# Altium PCB CoreV1.1_test.PcbDoc (part 8 of 14)
Units mil, origin at the board's own origin, x right, y up, seen from the top; angles counter-clockwise.
Board outline 2860 x 2420 mil, 6 copper layers (Top Layer, GND, SIGNAL_1, SIGNAL_2, POWER, Bottom Layer); 110 components, 241 nets, 882 pads, 697 vias.
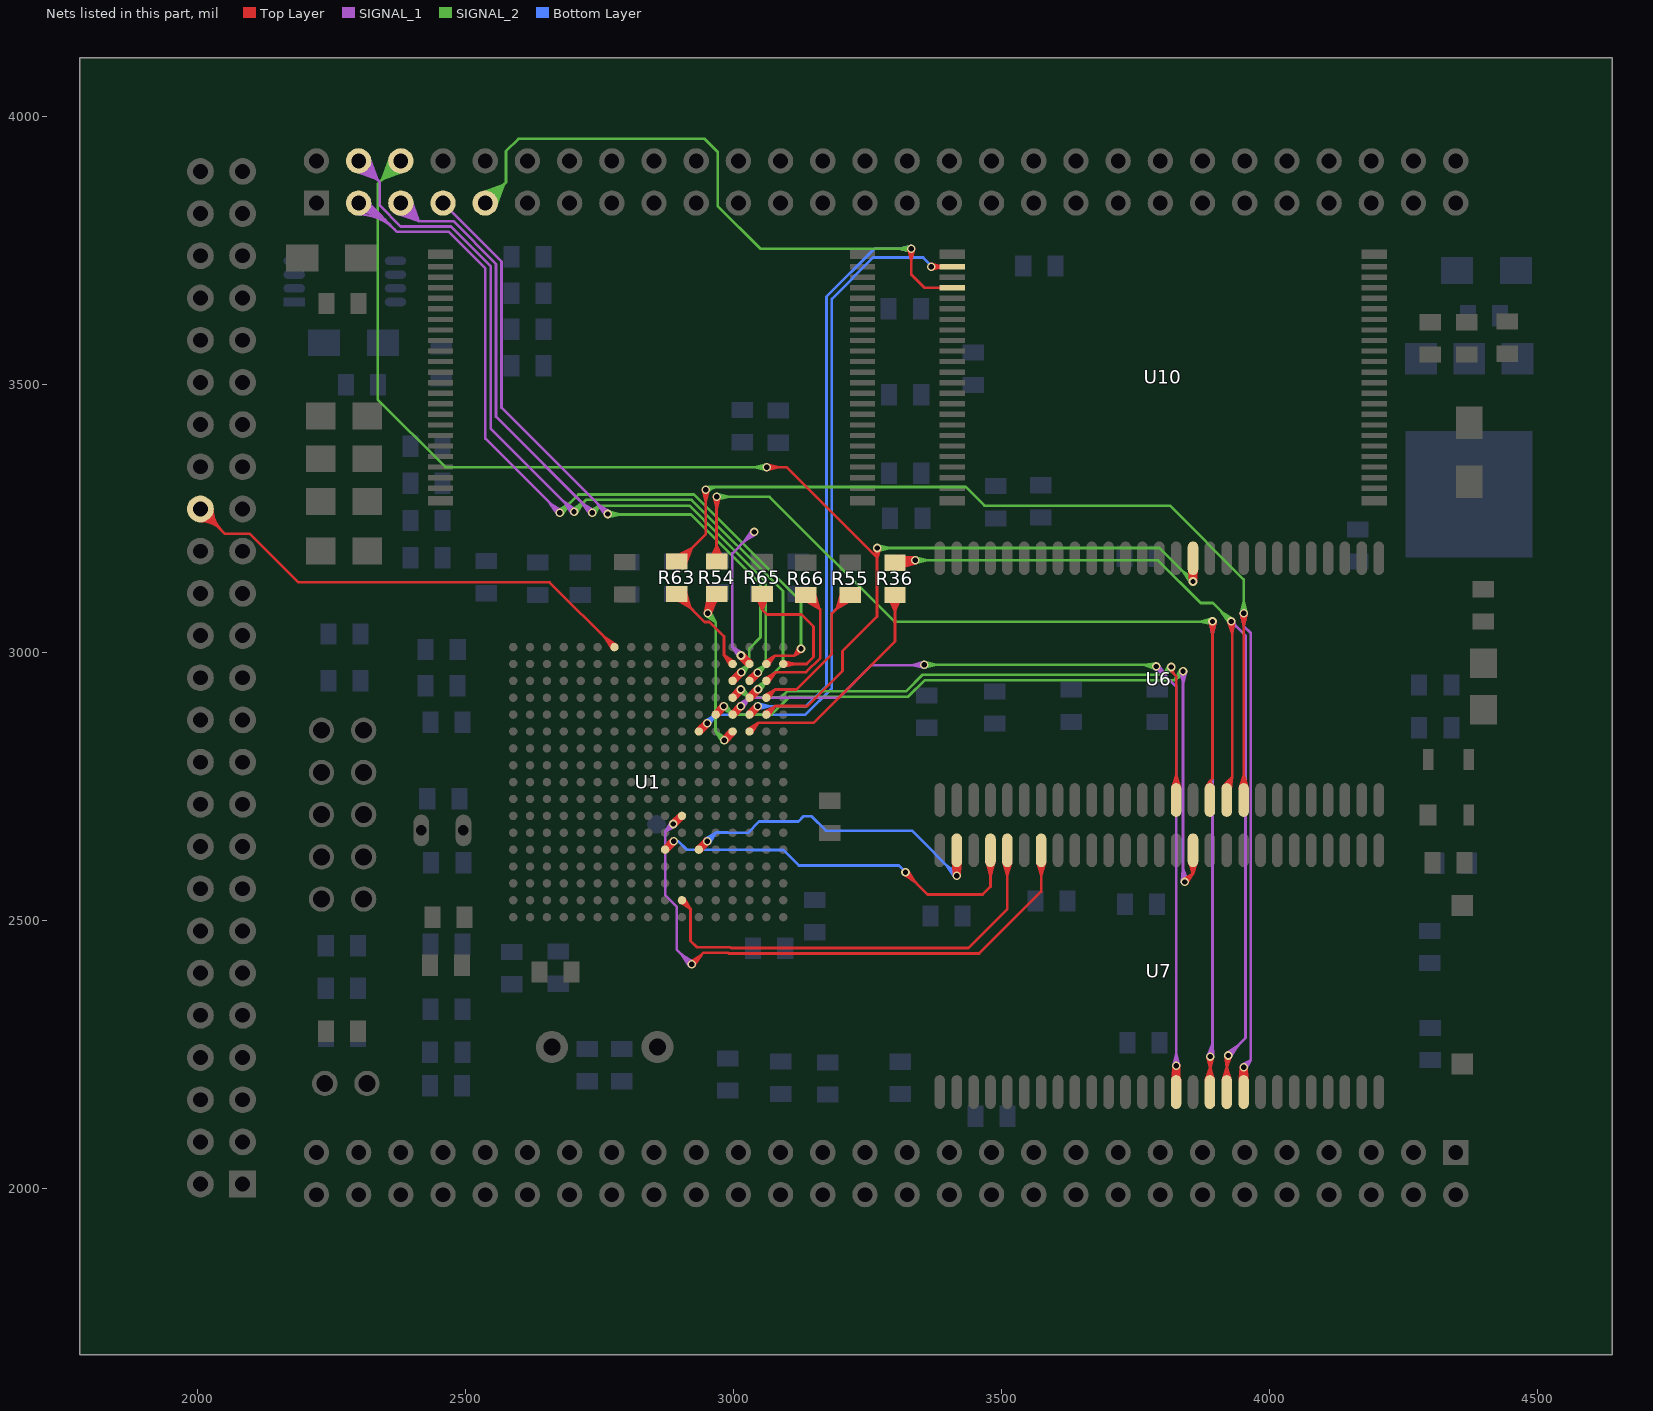
[diagram p12: the nets of this part, all layers, seen from the top]

## Via types
v1: diameter 16, hole 10, Top Layer to Bottom Layer, tented both sides, 637 vias
v2: diameter 30, hole 18, Top Layer to Bottom Layer, tented both sides, 56 vias
v3: diameter 16, hole 10, Top Layer to Bottom Layer, 2 vias
v4: diameter 30, hole 16, Top Layer to Bottom Layer, tented both sides, 1 vias
v5: diameter 16/16/16/16 (per signal layer), hole 10, Top Layer to Bottom Layer, tented both sides, 1 vias

## Nets (pads, with @x,y where several pads share a name; then routed paths per layer and width w, separated by ;. In a path a pad name is that pad's centre, name@x,y a point inside that pad or via, vN(x,y) a via of type N, cw(c..) or ccw(c..) an arc to the next point about the centre after c; other vN are vias at no path point) (continued)
LDATA28: U1.G11 U7.48 | length 1829.6
  Top Layer w5: v1@2883.32,2683.57 U1.G11@2899.63,2698.44 ; v1@2885.44,2685.1 U1.G11@2907.17,2690.9 ; v1@2887.5,2685.5 ccw(c2887.5,2701.76) U1.G11@2899,2690.26 ; v1@2890.73,2675.55 U1.G11@2907.17,2690.9 ; v1@2892.44,2677.57 U1.G11@2899.63,2698.44 ; v1@2893,2680 cw(c2903.29,2680) 2896.02,2687.28 ; U1.G11@2898.5,2695.14 cw(c2885.53,2695.14) 2894.7,2685.97 cw(c2903.88,2676.79) U1.G11@2903.88,2689.77 ; v1@2918.54,2422.27 2940.61,2436.61 v1@2926.27,2414.54 ; v1(2922,2418) 2944,2440 2989.72,2440 ; v1@2922,2423.5 ccw(c2922,2436.78) 2931.39,2427.39 ccw(c2940.78,2418) v1@2927.5,2418 ; 2990.72,2439 2991.22,2438.5 3458.5,2438.5 3574.1,2554.1 U7.48@3574.1,2630.91 ; U7.48@3566.84,2608.18 3574.1,2584.42 ; U7.48@3568.91,2604.07 cw(c3556.38,2591.53) 3574.1,2591.53 cw(c3591.83,2591.53) U7.48@3579.29,2604.07 ; U7.48@3574.1,2609.26 3574.1,2584.42 ; U7.48@3581.36,2608.18 3574.1,2584.42 ; v1(2887.5,2680) v1@2888.74,2680 ; v1(2887.5,2680) U1.G11@2903.88,2695.14 ; v1(2887.5,2680) U1.G11@2907.17,2690.9 ; v1(2887.5,2680) U1.G11@2899.63,2698.44 ; v1(2887.5,2680) U1.G11@2903.88,2695.14 ; v1@2888.74,2680 U1.G11@2903.88,2695.14 ; v1@2888.74,2680 U1.G11@2907.17,2690.9 ; v1@2888.74,2680 U1.G11@2899.63,2698.44 ; v1@2888.74,2680 U1.G11@2903.88,2695.14 ; U1.G11@2903.88,2695.14 2884.29,2684.47 U1.G11@2903.88,2695.14 ; U1.G11@2903.88,2695.14 2891.7,2676.45 U1.G11@2903.88,2695.14
  SIGNAL_1 w5: v1@2882,2680 cw(c2868.72,2680) 2878.11,2670.61 cw(c2887.5,2661.22) v1@2887.5,2674.5 ; v1@2883.14,2683.35 2872.5,2665 ; v1@2890.85,2675.64 2872.5,2665 ; v1@2916.5,2418 ccw(c2903.22,2418) 2912.61,2427.39 ccw(c2922,2436.78) v1@2922,2423.5 ; v1@2917.73,2414.54 2903.39,2436.61 ; v1@2925.46,2422.27 2903.39,2436.61 ; 2872.5,2665 v1(2887.5,2680) 2872.5,2665 ; 2872.5,2665 2872.5,2590.96 2872.51,2547.29 2894,2525.8 2894,2446 v1(2922,2418) 2903.39,2436.61
LDATA29: U1.G16 U7.50 | length 987
  Top Layer w5: U1.G16@2900.56,2533.44 2919.87,2521.66 ; U1.G16@2903.88,2532.29 cw(c2903.88,2519.31) 2913.05,2528.49 cw(c2922.23,2537.66) U1.G16@2909.25,2537.66 ; U1.G16@2903.88,2537.66 2919.87,2521.66 ; U1.G16@2908.1,2540.98 2919.87,2521.66 ; U7.50@3503.85,2608.18 3511.11,2584.42 ; U7.50@3505.92,2604.07 cw(c3493.38,2591.53) 3511.11,2591.53 cw(c3528.84,2591.53) U7.50@3516.3,2604.07 ; U7.50@3511.11,2609.26 3511.11,2584.42 ; U7.50@3511.11,2630.91 3511.11,2521.11 3438.5,2448.5 2995.36,2448.5 2993.86,2450 2931.83,2450 2919.87,2461.95 2919.87,2521.66 ; U7.50@3518.37,2608.18 3511.11,2584.42
LDATA30: U1.H13 U7.51 | length 1192.5
  Top Layer w5: U1.H13@2872.38,2637.52 ccw(c2872.38,2650.5) 2881.56,2641.32 ccw(c2890.73,2632.15) U1.H13@2877.76,2632.15 ; v1@2882.73,2648 cw(c2869.45,2648) 2878.84,2638.61 cw(c2888.23,2629.22) v1@2888.23,2642.5 ; v1@2883.21,2650.25 U1.H13@2876.61,2628.83 ; v1@2883.9,2651.38 U1.H13@2872.38,2632.15 ; v1@2884.82,2652.32 U1.H13@2869.06,2636.38 ; v1@2890.49,2642.98 U1.H13@2869.06,2636.38 ; v1@2891.61,2643.66 U1.H13@2872.38,2632.15 ; v1@2892.55,2644.59 U1.H13@2876.61,2628.83 ; v1@3317.54,2585.73 3339.61,2571.39 v1@3325.27,2593.46 ; v1@3321,2584.5 cw(c3321,2571.22) 3330.39,2580.61 cw(c3339.78,2590) v1@3326.5,2590 ; v1(3321,2590) 3362.5,2548.5 3465,2548.5 3479.61,2563.11 U7.51@3479.61,2630.91 ; U7.51@3472.35,2608.18 3479.61,2584.42 ; U7.51@3474.42,2604.07 cw(c3461.89,2591.53) 3479.61,2591.53 cw(c3497.34,2591.53) U7.51@3484.81,2604.07 ; U7.51@3479.61,2609.26 3479.61,2584.42 ; U7.51@3486.88,2608.18 3479.61,2584.42 ; U1.H13@2869.06,2636.38 v1(2888.23,2648) ; U1.H13@2869.06,2636.38 v1(2888.23,2648) ; U1.H13@2872.38,2632.15 v1(2888.23,2648) ; U1.H13@2872.38,2632.15 v1(2888.23,2648) ; U1.H13@2876.61,2628.83 v1(2888.23,2648) ; U1.H13@2876.61,2628.83 v1(2888.23,2648)
  Bottom Layer w5: v1(2888.23,2648) 2896.86,2648 2912.86,2632 3031.5,2632 3032,2631.5 3093,2631.5 3122,2602.5 3308.5,2602.5 v1(3321,2590)
LDATA31: U1.F13 U7.53 | length 1433.3
  Top Layer w5: U1.F13@2935.37,2631.63 U1.F13@2935.37,2632.15 ; U1.F13@2935.37,2637.52 ccw(c2935.37,2650.5) 2944.55,2641.32 ccw(c2953.72,2632.15) U1.F13@2940.75,2632.15 ; v1@2945.72,2648 cw(c2932.45,2648) 2941.83,2638.61 cw(c2951.22,2629.22) v1@2951.22,2642.5 ; v1@2946.21,2650.25 U1.F13@2939.6,2628.83 ; v1@2946.89,2651.38 U1.F13@2935.37,2632.15 ; v1@2947.82,2652.32 U1.F13@2932.06,2636.38 ; v1@2953.48,2642.98 U1.F13@2932.06,2636.38 ; v1@2954.61,2643.66 U1.F13@2935.37,2632.15 ; v1@2955.54,2644.59 U1.F13@2939.6,2628.83 ; U7.53@3409.36,2608.18 v1@3416.62,2584.42 ; v1@3411.2,2582.7 U7.53@3410.02,2606.01 ; U7.53@3411.43,2604.07 cw(c3398.9,2591.53) 3416.62,2591.53 cw(c3434.35,2591.53) U7.53@3421.81,2604.07 ; v1@3411.57,2585.79 U7.53@3423.22,2606.01 ; v1@3412.73,2587.51 ccw(c3403.34,2596.9) 3416.62,2596.9 ccw(c3429.9,2596.9) v1@3420.51,2587.51 ; U7.53@3416.62,2609.26 v1@3416.62,2584.42 ; U7.53@3416.62,2630.91 v1(3416.62,2583.62) ; v1@3421.68,2585.79 U7.53@3410.02,2606.01 ; v1@3422.04,2582.7 U7.53@3423.22,2606.01 ; U7.53@3423.88,2608.18 v1@3416.62,2584.42 ; U1.F13@2932.06,2636.38 v1(2951.22,2648) ; U1.F13@2932.06,2636.38 v1(2951.22,2648) ; U1.F13@2935.37,2632.15 v1(2951.22,2648) ; U1.F13@2935.37,2632.15 v1(2951.22,2648) ; U1.F13@2939.6,2628.83 v1(2951.22,2648) ; U1.F13@2939.6,2628.83 v1(2951.22,2648) ; U7.53@3410.02,2606.01 v1(3416.62,2583.62) ; v1(3416.62,2583.62) U7.53@3423.22,2606.01 ; v1(3416.62,2583.62) U7.53@3416.62,2606.62 ; U7.53@3416.62,2606.62 3411.16,2584.28 U7.53@3416.62,2606.62 ; U7.53@3416.62,2606.62 3422.08,2584.28 U7.53@3416.62,2606.62
  Bottom Layer w5: v1@2947.84,2652.33 2967.24,2664.02 ; v1(2951.22,2648) 2967.24,2664.02 ; v1@2951.22,2653.5 ccw(c2951.22,2666.78) 2960.61,2657.39 ccw(c2970,2648) v1@2956.72,2648 ; v1@2955.56,2644.61 2967.24,2664.02 ; v1@3411.12,2583.62 ccw(c3397.84,2583.62) 3407.23,2593.01 ccw(c3416.62,2602.4) v1@3416.62,2589.12 ; v1@3412.35,2580.16 3398.02,2602.23 ; v1@3420.08,2587.9 3398.02,2602.23 ; 2967.24,2664.02 2988.42,2664.02 2988.94,2663.5 3027,2663.5 3048,2684.5 3121.06,2684.5 3131.06,2694.5 3145.42,2694.5 3172.42,2667.5 3332.74,2667.5 v1(3416.62,2583.62) 3398.02,2602.23
LEND: pad.PB34 U1.L1 | length 1177.3
  Top Layer w5: pad.PB34@2005.26,3245.34 cw(c2005.26,3191.02) 2043.67,3229.43 cw(c2082.08,3267.84) pad.PB34@2027.76,3267.84 ; pad.PB34@2005.26,3250.34 cw(c2005.26,3208.09) 2035.13,3237.97 cw(c2065.01,3267.84) pad.PB34@2022.76,3267.84 ; pad.PB34@2005.26,3255.34 cw(c2005.26,3225.16) 2026.6,3246.5 cw(c2047.94,3267.84) pad.PB34@2017.76,3267.84 ; pad.PB34@2005.26,3267.84 2051.5,3221.6 2097.46,3221.6 2188.06,3131 2657,3131 U1.L1@2777.89,3010.1 2759.41,3028.58 ; U1.L1@2772.52,3010.1 ccw(c2759.55,3010.1) 2768.72,3019.28 ccw(c2777.89,3028.45) U1.L1@2777.89,3015.48 ; U1.L1@2773.72,3006.71 2759.41,3028.58 ; U1.L1@2781.28,3014.27 2759.41,3028.58
LLNSCAS: R54.2 U1.D6 | length 1792.1
  Top Layer w5: v1@2946.53,3073.53 R54.2@2951.47,3096 ; v1@2946.55,3073.75 2952,3093.09 ; v1@2946.63,3074.19 R54.2@2954.29,3095.95 ; v1@2946.94,3075.14 R54.2@2958.57,3095.56 ; v1@2947.41,3076.04 R54.2@2963.07,3094.69 ; v1@2947.84,3076.59 2966.3,3093.78 ; v1@2948.11,3076.89 ccw(c2938.72,3086.28) 2952,3086.28 ccw(c2965.28,3086.28) v1@2955.89,3076.89 ; R54.2@2951.06,3111.42 v1@2952,3076.66 ; v1@2952,3071.26 cw(c2982.04,3071.26) R54.2@2968.88,3098.27 ; v1@2952,3079.26 cw(c2978.14,3079.26) R54.2@2966.69,3102.76 ; 2952,3087.26 cw(c2974.25,3087.26) R54.2@2964.5,3107.26 ; R54.2@2952,3095.25 cw(c2970.35,3095.25) R54.2@2962.31,3111.75 ; R54.2@2954.52,3100.72 cw(c2951.93,3098.17) 2954.5,3095.6 cw(c2959.1,3091) R54.2@2960.57,3097.33 ; R54.2@2956.1,3111.19 v1@2952,3076.66 ; v1@2956.84,3070.39 2966.3,3093.78 ; v1@2957.15,3071.07 R54.2@2963.07,3094.69 ; v1@2957.42,3072.09 R54.2@2958.57,3095.56 ; v1@2957.45,3073.75 2952,3093.09 ; v1@2957.44,3073.78 R54.2@2951.47,3096 ; v1@2957.5,3073.11 R54.2@2954.29,3095.95 ; R54.2@2968.41,3109.5 2952,3093.09 ; R54.2@2970.19,3106.29 v1@2952,3076.66 ; R54.2@2974.29,3103.35 v1@2952,3076.66 ; v1@2978.56,2839.24 U1.D6@2994.13,2855.92 ; v1@2980.55,2840.92 U1.D6@3001.67,2848.38 ; v1@2983,2841.5 ccw(c2983,2851.75) 2990.24,2844.5 ; v1@2986.58,2831.82 U1.D6@3001.67,2848.38 ; v1@2988.09,2833.92 U1.D6@2994.13,2855.92 ; v1@2988.5,2836 cw(c3004.81,2836) U1.D6@2993.28,2847.53 ; U1.D6@2992.99,2852.62 cw(c2980.02,2852.62) 2989.19,2843.45 cw(c2998.37,2834.27) U1.D6@2998.37,2847.25 ; R54.2@2951.47,3096 v1(2952,3073) ; v1(2952,3073) 2952,3093.09 ; v1(2952,3073) R54.2@2954.29,3095.95 ; v1(2952,3073) 2966.3,3093.78 ; v1(2952,3073) R54.2@2963.07,3094.69 ; v1(2952,3073) R54.2@2958.57,3095.56 ; v1@2952,3076.66 R54.2@2963.41,3109.5 ; 2952,3093.09 2970.93,3099.52 2952,3093.09 ; 2952,3093.09 2951.43,3113.07 2952,3093.09 ; 2952,3093.09 2968.65,3104.14 2952,3093.09 ; 2952,3093.09 2956.56,3112.55 2952,3093.09 ; 2952,3093.09 R54.2@2963.41,3109.5 ; 2952,3093.09 R54.2@2963.41,3109.5 ; v1(2983,2836) v1@2983,2837.26 ; v1(2983,2836) U1.D6@2998.37,2852.62 ; v1(2983,2836) U1.D6@3001.67,2848.38 ; v1(2983,2836) U1.D6@2994.13,2855.92 ; v1(2983,2836) U1.D6@2998.37,2852.62 ; v1@2983,2837.26 U1.D6@2998.37,2852.62 ; v1@2983,2837.26 U1.D6@3001.67,2848.38 ; v1@2983,2837.26 U1.D6@2994.13,2855.92 ; v1@2983,2837.26 U1.D6@2998.37,2852.62 ; U1.D6@2998.37,2852.62 2979.44,2840.2 U1.D6@2998.37,2852.62 ; U1.D6@2998.37,2852.62 2987.46,2832.78 U1.D6@2998.37,2852.62
  SIGNAL_2 w5: v1@2948.35,3068.89 2966.87,3056.13 ; v1@2952,3067.5 cw(c2952,3059.05) 2957.97,3065.03 ; v1@2956.54,3076.11 2966.87,3056.13 ; v1@2957.5,3073 ccw(c2975.61,3073) 2962.8,3060.2 ; 2966.87,3028 2966.87,3022 ; v1@2977.5,2836 ccw(c2964.22,2836) 2973.61,2845.39 ccw(c2983,2854.78) v1@2983,2841.5 ; v1@2978.68,2832.6 2966.5,2852.5 ; v1@2986.4,2840.32 2966.5,2852.5 ; 2966.5,2852.5 2966.5,2923.63 2966.87,2924 2966.87,3022 ; 2966.5,2852.5 v1(2983,2836) 2966.5,2852.5 ; 2966.87,3022 2966.87,3056.13 ; 2966.87,3056.13 2952,3071 v1(2952,3073) 2966.87,3056.13
LLNSCS0: R63.2 U1.D2 | length 520.6
  Top Layer w5: R63.2@2891.17,3100.1 2919.48,3083.6 ; R63.2@2894.04,3104.26 2919.48,3083.6 ; R63.2@2894.41,3109.5 2894.41,3108.67 2945.98,3057.1 2955.42,3057.1 2982.24,3030.27 2982.24,2994.73 ; R63.2@2899.41,3097 cw(c2899.41,3080.91) 2910.79,3092.29 ; R63.2@2899.41,3109.5 2919.48,3083.6 ; R63.2@2901.91,3109.5 ccw(c2922.03,3109.5) R63.2@2907.8,3095.28 ; R63.2@2905.82,3113.39 2919.48,3083.6 ; R63.2@2906.91,3109.5 ccw(c2939.1,3109.5) 2916.34,3086.74 ; R63.2@2910.57,3115.14 2919.48,3083.6 ; R63.2@2911.91,3109.5 ccw(c2956.17,3109.5) 2924.87,3078.21 ; U1.D2@2992.99,2978.61 ccw(c2980.02,2978.61) 2989.19,2987.78 ccw(c2998.37,2996.95) U1.D2@2998.37,2983.98 ; U1.D2@2994.14,2975.28 2982.24,2994.73 ; U1.D2@3001.69,2982.83 2982.24,2994.73 ; 2982.24,2994.73 U1.D2@2998.37,2978.61 2982.24,2994.73
LLNSRAS: R36.2 U1.C6 | length 744.3
  Top Layer w5: U1.C6@3026.62,2856.91 3046.73,2868.74 ; U1.C6@3029.86,2858 ccw(c3029.86,2872.78) 3040.31,2862.32 ; U1.C6@3034,2849.19 3046.73,2868.74 ; U1.C6@3035.24,2852.62 cw(c3046.4,2852.62) 3038.51,2860.52 ; R36.2@3289.18,3104.9 3301.41,3077.5 ; R36.2@3292.57,3098.67 cw(c3271.23,3077.33) 3301.41,3077.33 cw(c3331.59,3077.33) R36.2@3310.25,3098.67 ; R36.2@3293.97,3106.57 3301.41,3077.5 ; R36.2@3296.11,3102.2 cw(c3283.3,3089.4) 3301.41,3089.4 cw(c3319.51,3089.4) R36.2@3306.71,3102.2 ; R36.2@3308.85,3106.57 3301.41,3077.5 ; R36.2@3313.63,3104.9 3301.41,3077.5 ; 3046.73,2868.74 3030.61,2852.62 U1.C6@3029.86,2852.62 3046.73,2868.74 ; 3046.73,2868.74 3149.68,2868.74 3301.41,3020.47 R36.2@3301.41,3107.5 3301.41,3077.5
LLSCKE: R65.2 U1.A2 | length 538.8
  Top Layer w5: R65.2@3041.21,3106.41 3053.41,3080.24 ; R65.2@3044.86,3100 cw(c3026.32,3080.25) 3053.41,3080.25 ; R65.2@3045.97,3108.14 3053.41,3080.24 ; R65.2@3048.28,3103.65 cw(c3037.16,3091.79) 3053.41,3091.79 cw(c3069.66,3091.79) R65.2@3058.54,3103.65 ; R65.2@3051.41,3107.5 3053.41,3107.5 3053.41,3080.24 ; R65.2@3053.41,3109.12 3053.41,3080.24 ; R65.2@3060.85,3108.14 3053.41,3080.24 ; R65.2@3061.96,3100 ccw(c3080.5,3080.25) 3053.41,3080.25 ; R65.2@3065.61,3106.41 3053.41,3080.24 ; U1.A2@3092.85,2978.61 3136.61,2978.61 3149.5,2991.5 3149.5,3048.5 3127,3071 3062.65,3071 3053.41,3080.24 ; U1.A2@3093.49,2973.27 3115.73,2978.61 U1.A2@3093.49,2983.94 ; U1.A2@3096.65,2974.81 cw(c3105.83,2965.63) 3105.83,2978.61 cw(c3105.83,2991.58) U1.A2@3096.65,2982.41
LLSCLK0: R55.2 U1.B4 | length 603.3
  Top Layer w5: U1.B4@3058.14,2919.92 3077.49,2931 ; U1.B4@3061.36,2920.99 ccw(c3061.36,2935.77) 3071.81,2925.32 ; U1.B4@3065.51,2912.2 3077.49,2931 ; U1.B4@3066.73,2915.61 cw(c3077.9,2915.61) 3070,2923.51 ; 3188.2,3077.63 ccw(c3158.33,3107.5) R55.2@3200.58,3107.5 ; 3196.74,3086.17 ccw(c3175.4,3107.5) R55.2@3205.58,3107.5 ; 3200.27,3089.7 cw(c3213.08,3076.9) R55.2@3213.08,3095 ; R55.2@3202.03,3113.35 3192.47,3081.9 ; R55.2@3206.74,3111.51 3192.47,3081.9 ; R55.2@3213.08,3107.5 3192.47,3081.9 ; R55.2@3218.08,3107.5 3183.5,3072.93 3183.5,2997.22 3117.28,2931 3077.49,2931 ; R55.2@3218.35,3102.17 3192.47,3081.9 ; R55.2@3221.15,3097.96 3192.47,3081.9 ; 3077.49,2931 3062.11,2915.61 U1.B4@3061.36,2915.61 3077.49,2931
LLSCLK1: R66.2 U1.B3 | length 561.6
  Top Layer w5: U1.B3@3058.23,2951.48 3079.26,2963.23 ; U1.B3@3061.36,2952.48 ccw(c3061.36,2969.76) 3073.58,2957.55 ; U1.B3@3065.38,2943.54 3079.26,2963.23 ; U1.B3@3066.73,2947.11 cw(c3075.4,2947.11) 3069.27,2953.24 ; R66.2@3131.67,3097.96 3160.35,3081.9 ; R66.2@3134.47,3102.17 3160.35,3081.9 ; R66.2@3134.74,3107.5 3162,3080.25 3162,2989.86 3135.37,2963.23 3079.26,2963.23 ; R66.2@3139.74,3095 cw(c3139.74,3076.9) 3152.55,3089.7 cw(c3166.19,3103.32) R66.2@3147.15,3106.33 ; R66.2@3139.74,3107.5 3160.35,3081.9 ; R66.2@3146.08,3111.51 3160.35,3081.9 ; R66.2@3150.79,3113.35 3160.35,3081.9 ; R66.2@3152.09,3105.55 ccw(c3178.17,3101.42) 3159.5,3082.75 ; 3079.26,2963.23 3063.14,2947.11 U1.B3@3061.36,2947.11 3079.26,2963.23
LNGCS0: U1.F6 U10.26 | length 1781.4
  Top Layer w5: U1.F6@2935.37,2858 ccw(c2935.37,2870.97) 2944.55,2861.8 ccw(c2953.72,2852.62) U1.F6@2940.75,2852.62 ; v1@2945.5,2868.25 cw(c2932.22,2868.25) 2941.61,2858.86 cw(c2951,2849.47) v1@2951,2862.75 ; v1@2945.97,2870.47 U1.F6@2939.61,2849.31 ; v1@2946.66,2871.62 U1.F6@2935.37,2852.62 ; v1@2947.6,2872.57 U1.F6@2932.06,2856.86 ; v1@2953.23,2863.22 U1.F6@2932.06,2856.86 ; v1@2954.37,2863.91 U1.F6@2935.37,2852.62 ; v1@2955.32,2864.85 U1.F6@2939.61,2849.31 ; v1@3369.66,3714.54 3392,3720 v1@3369.66,3725.46 ; v1@3369.71,3725.45 U10.26@3389.72,3720.06 ; v1@3369.74,3714.55 U10.26@3389.72,3720.06 ; v1@3369.8,3720 U10.26@3389.72,3720.06 ; v1@3372.89,3716.11 cw(c3382.28,3706.72) 3382.28,3720 cw(c3382.28,3733.28) v1@3372.89,3723.89 ; 3383.74,3720 ccw(c3383.74,3726.04) U10.26@3388.01,3721.77 ; 3384.02,3720 cw(c3384.02,3714.35) U10.26@3388.01,3718.35 ; U10.26@3408.42,3720.06 3408.37,3720 v1(3369,3720) U10.26@3389.72,3720.06 ; U1.F6@2932.06,2856.86 v1(2951,2868.25) ; U1.F6@2932.06,2856.86 v1(2951,2868.25) ; U1.F6@2935.37,2852.62 v1(2951,2868.25) ; U1.F6@2935.37,2852.62 v1(2951,2868.25) ; U1.F6@2939.61,2849.31 v1(2951,2868.25) ; U1.F6@2939.61,2849.31 v1(2951,2868.25)
  Bottom Layer w5: v1@2947.62,2872.58 2966.87,2884.12 ; v1(2951,2868.25) 2966.87,2884.12 ; v1@2951,2873.75 ccw(c2951,2887.03) 2960.39,2877.64 ccw(c2969.78,2868.25) v1@2956.5,2868.25 ; v1@2955.34,2864.86 2966.87,2884.12 ; v1(3369,3720) 3369,3721.92 3353.92,3737 3260.64,3737 3183.5,3659.86 3183.5,2933.36 3134.13,2883.99 3007.32,2883.99 3007.19,2884.12 2966.87,2884.12
LNGCS1: pad.PC3 U1.B2 | length 2181.1
  Top Layer w5: U1.B2@3058.15,2982.91 3077.48,2993.98 ; U1.B2@3061.36,2983.98 ccw(c3061.36,2998.76) 3071.81,2988.31 ; U1.B2@3065.51,2975.19 3077.48,2993.98 ; U1.B2@3066.73,2978.61 cw(c3077.9,2978.61) 3070,2986.5 ; v1@3120.5,3007 cw(c3107.22,3007) 3116.61,2997.61 cw(c3126,2988.22) v1@3126,3001.5 ; v1@3121.57,3010.26 3112.98,2993.98 ; v1@3129.26,3002.57 3112.98,2993.98 ; 3077.48,2993.98 3112.98,2993.98 ; 3077.48,2993.98 3062.11,2978.61 U1.B2@3061.36,2978.61 3077.48,2993.98 ; 3112.98,2993.98 v1(3126,3007) 3112.98,2993.98
  SIGNAL_1 w5: pad.PC3@2300.54,3817.59 cw(c2300.54,3722.52) 2367.76,3789.74 ; pad.PC3@2300.54,3822.59 cw(c2300.54,3739.59) 2359.22,3798.28 ; pad.PC3@2300.54,3827.59 cw(c2300.54,3756.66) 2350.69,3806.81 ; pad.PC3@2300.54,3832.59 cw(c2300.54,3773.73) 2342.15,3815.35 ; pad.PC3@2300.54,3837.59 cw(c2300.54,3790.8) 2333.62,3823.88 ; pad.PC3@2300.54,3838.71 2318.79,3838.71 2372.5,3785 2468.86,3785 2536.98,3716.88 2536.98,3399.52 v1(2676,3260.5) 2657.39,3279.11 ; pad.PC3@2300.54,3842.59 cw(c2300.54,3807.87) 2325.08,3832.42 ; pad.PC3@2321.66,3838.71 ccw(c2328.58,3838.71) 2323.68,3833.82 ; v1@2670.5,3260.5 ccw(c2657.22,3260.5) 2666.61,3269.89 ccw(c2676,3279.28) v1@2676,3266 ; v1@2671.73,3257.04 2657.39,3279.11 ; v1@2679.46,3264.77 2657.39,3279.11
  SIGNAL_2 w5: v1@2672.54,3264.77 2694.61,3279.11 v1@2680.27,3257.04 ; v1(2676,3260.5) 2710.43,3294.93 2926.21,3294.93 3126,3095.14 v1(3126,3007) ; v1@2676,3266 ccw(c2676,3279.28) 2685.39,3269.89 ccw(c2694.78,3260.5) v1@2681.5,3260.5 ; v1@3122.11,3010.89 ccw(c3112.72,3020.28) 3126,3020.28 ccw(c3139.28,3020.28) v1@3129.89,3010.89
LNGCS2: pad.PC5 U1.C3 | length 2410.7
  Top Layer w5: U1.C3@3029.86,2952.48 ccw(c3029.86,2965.46) 3039.04,2956.28 ccw(c3048.21,2947.11) U1.C3@3035.24,2947.11 ; v1@3039.74,2962.48 cw(c3026.46,2962.48) 3035.85,2953.09 cw(c3045.24,2943.71) v1@3045.24,2956.98 ; v1@3040.19,2964.68 U1.C3@3034.1,2943.81 ; v1@3040.89,2965.85 U1.C3@3029.86,2947.11 ; v1@3041.84,2966.81 U1.C3@3026.56,2951.35 ; v1@3047.43,2957.44 U1.C3@3026.56,2951.35 ; v1@3048.6,2958.13 U1.C3@3029.86,2947.11 ; v1@3049.57,2959.09 U1.C3@3034.1,2943.81 ; U1.C3@3026.56,2951.35 v1(3045.24,2962.48) ; U1.C3@3026.56,2951.35 v1(3045.24,2962.48) ; U1.C3@3029.86,2947.11 v1(3045.24,2962.48) ; U1.C3@3029.86,2947.11 v1(3045.24,2962.48) ; U1.C3@3034.1,2943.81 v1(3045.24,2962.48) ; U1.C3@3034.1,2943.81 v1(3045.24,2962.48)
  SIGNAL_1 w5: pad.PC5@2368.02,3820.83 2412.98,3805 ; pad.PC5@2369.97,3825.54 2412.98,3805 ; pad.PC5@2372.38,3829.98 2412.98,3805 ; pad.PC5@2375.23,3834.11 2412.98,3805 ; pad.PC5@2379.28,3838.71 2412.98,3805 ; pad.PC5@2379.82,3827.6 cw(c2380.93,3804.86) 2397.02,3820.96 cw(c2413.12,3837.05) pad.PC5@2390.38,3838.17 ; pad.PC5@2380.06,3822.61 cw(c2381.67,3789.65) 2405,3812.98 cw(c2428.33,3836.31) pad.PC5@2395.38,3837.92 ; pad.PC5@2380.31,3817.61 cw(c2382.42,3774.44) 2412.98,3805 ; pad.PC5@2383.87,3842.75 2412.98,3805 ; pad.PC5@2388,3845.6 2412.98,3805 ; pad.PC5@2392.44,3848.02 2412.98,3805 ; pad.PC5@2397.15,3849.96 2412.98,3805 ; pad.PC5@2400.37,3837.68 ccw(c2443.55,3835.57) 2412.98,3805 ; v1@2731,3260.5 ccw(c2717.72,3260.5) 2727.11,3269.89 ccw(c2736.5,3279.28) v1@2736.5,3266 ; v1@2732.23,3257.04 2717.89,3279.11 ; v1@2739.96,3264.77 2717.89,3279.11 ; 2412.98,3805 2477.14,3805 2556.98,3725.17 2556.98,3440.02 v1(2736.5,3260.5) 2717.89,3279.11
  SIGNAL_2 w5: v1@2733.21,3264.91 2750,3274 ; v1(2736.5,3260.5) 2750,3274 ; v1@2736.5,3266 ccw(c2736.5,3279.28) 2745.89,3269.89 ccw(c2755.28,3260.5) v1@2742,3260.5 ; v1@2740.91,3257.21 2750,3274 ; 2945.5,3246.64 2953.57,3238.57 ; v1@3041.87,2966.84 3060.5,2977.75 ; v1(3045.24,2962.48) 3060.5,2977.75 ; v1@3045.24,2967.98 ccw(c3045.24,2981.26) 3054.63,2971.87 ccw(c3064.01,2962.48) v1@3050.74,2962.48 ; v1@3049.59,2959.12 3060.5,2977.75 ; 2750,3274 2918.14,3274 2953.57,3238.57 ; 2953.57,3238.57 3060.5,3131.64 3060.5,2977.75
LNGCS3: pad.PC4 U1.C4 | length 2677
  Top Layer w5: U1.C4@3029.86,2920.99 ccw(c3029.86,2933.96) 3039.04,2924.79 ccw(c3048.21,2915.61) U1.C4@3035.24,2915.61 ; v1@3040.25,2931.5 cw(c3026.97,2931.5) 3036.36,2922.11 cw(c3045.75,2912.72) v1@3045.75,2926 ; v1@3040.73,2933.76 U1.C4@3034.09,2912.3 ; v1@3041.41,2934.88 U1.C4@3029.86,2915.61 ; v1@3042.34,2935.82 U1.C4@3026.54,2919.84 ; v1@3048.01,2926.48 U1.C4@3026.54,2919.84 ; v1@3049.13,2927.16 U1.C4@3029.86,2915.61 ; v1@3050.06,2928.09 U1.C4@3034.09,2912.3 ; U1.C4@3026.54,2919.84 v1(3045.75,2931.5) ; U1.C4@3026.54,2919.84 v1(3045.75,2931.5) ; U1.C4@3029.86,2915.61 v1(3045.75,2931.5) ; U1.C4@3029.86,2915.61 v1(3045.75,2931.5) ; U1.C4@3034.09,2912.3 v1(3045.75,2931.5) ; U1.C4@3034.09,2912.3 v1(3045.75,2931.5)
  SIGNAL_1 w5: pad.PC4@2289.22,3899.61 2334.76,3883.22 ; pad.PC4@2291.19,3904.31 2334.76,3883.22 ; pad.PC4@2293.63,3908.73 2334.76,3883.22 ; pad.PC4@2296.49,3912.85 2334.76,3883.22 ; pad.PC4@2300.54,3896.33 cw(c2300.54,3845.33) 2336.59,3881.39 cw(c2372.65,3917.45) pad.PC4@2321.66,3917.45 ; pad.PC4@2300.54,3901.33 cw(c2300.54,3862.4) 2328.06,3889.93 cw(c2355.58,3917.45) pad.PC4@2316.66,3917.45 ; pad.PC4@2300.54,3906.33 cw(c2300.54,3879.48) 2319.52,3898.46 cw(c2338.51,3917.45) pad.PC4@2311.66,3917.45 ; pad.PC4@2300.54,3917.45 2340,3877.98 2340,3833.97 2378.97,3795 2473,3795 2546.98,3721.02 2546.98,3418.03 v1(2702.5,3262.5) 2683.89,3281.11 ; pad.PC4@2305.13,3921.49 2334.76,3883.22 ; pad.PC4@2309.25,3924.36 2334.76,3883.22 ; pad.PC4@2313.68,3926.79 2334.76,3883.22 ; pad.PC4@2318.37,3928.77 2334.76,3883.22 ; v1@2697,3262.5 ccw(c2683.72,3262.5) 2693.11,3271.89 ccw(c2702.5,3281.28) v1@2702.5,3268 ; v1@2698.23,3259.04 2683.89,3281.11 ; v1@2705.96,3266.78 2683.89,3281.11
  SIGNAL_2 w5: v1@2699.04,3266.78 2721.11,3281.11 v1@2706.77,3259.04 ; v1(2702.5,3262.5) 2724.93,3284.93 2922.07,3284.93 3092.5,3114.5 3092.5,2978.25 v1(3045.75,2931.5) ; v1@2702.5,3268 ccw(c2702.5,3281.28) 2711.89,3271.89 ccw(c2721.28,3262.5) v1@2708,3262.5 ; v1@3042.29,2935.77 3064.35,2950.11 v1@3050.02,2928.04 ; v1@3045.75,2937 ccw(c3045.75,2950.28) 3055.14,2940.89 ccw(c3064.53,2931.5) v1@3051.25,2931.5
LNGCS4: pad.PC7 U1.D3 | length 1882.6
  Top Layer w5: U1.D3@2998.37,2952.48 ccw(c2998.37,2965.99) 3007.92,2956.44 ; U1.D3@3003.74,2947.11 cw(c3016.18,2947.11) 3007.38,2955.91 ; v1@3008.99,2963.01 cw(c2995.71,2963.01) 3005.1,2953.62 cw(c3014.49,2944.23) v1@3014.49,2957.51 ; v1@3009.49,2965.32 U1.D3@3002.57,2943.76 ; v1@3010.15,2966.4 U1.D3@2998.59,2947.11 ; v1@3010.18,2966.43 U1.D3@2998.37,2947.11 ; v1@3011.11,2967.35 U1.D3@2995.07,2951.36 ; v1@3016.73,2957.99 U1.D3@2995.07,2951.36 ; v1@3017.85,2958.66 U1.D3@2998.37,2947.11 ; v1@3017.87,2958.68 U1.D3@2998.59,2947.11 ; v1@3018.78,2959.57 U1.D3@3002.57,2943.76 ; U1.D3@2995.07,2951.36 v1(3014.49,2963.01) ; U1.D3@2995.07,2951.36 v1(3014.49,2963.01) ; U1.D3@2998.37,2947.11 U1.D3@2998.59,2947.11 ; U1.D3@2998.37,2947.11 v1(3014.49,2963.01) ; U1.D3@2998.37,2947.11 v1(3014.49,2963.01) ; U1.D3@2998.59,2947.11 v1(3014.49,2963.01) ; U1.D3@2998.59,2947.11 v1(3014.49,2963.01) ; U1.D3@3002.57,2943.76 v1(3014.49,2963.01) ; U1.D3@3002.57,2943.76 v1(3014.49,2963.01)
  SIGNAL_1 w5: pad.PC7@2458.02,3838.71 2566.98,3729.75 2566.98,3457.02 v1(2765.5,3258.5) 2746.89,3277.11 ; v1@2760,3258.5 ccw(c2746.72,3258.5) 2756.11,3267.89 ccw(c2765.5,3277.28) v1@2765.5,3264 ; v1@2761.23,3255.04 2746.89,3277.11 ; v1@2768.96,3262.77 2746.89,3277.11
  SIGNAL_2 w5: v1@2765.92,3253.02 2788.56,3257.5 ; v1@2766.39,3263.93 2788.56,3257.5 ; v1@2769.39,3254.61 cw(c2776.36,3247.64) 2776.36,3257.5 ; v1@2769.39,3262.39 ccw(c2781.19,3274.19) 2781.19,3257.5 ; v1@3011.14,2967.37 3029.5,2978.02 ; v1(3014.49,2963.01) 3029.5,2978.02 ; v1@3014.49,2968.51 ccw(c3014.49,2981.79) 3023.88,2972.4 ccw(c3033.27,2963.01) v1@3019.99,2963.01 ; v1@3018.85,2959.66 3029.5,2978.02 ; 2788.56,3257.5 v1(2765.5,3258.5) 2766.5,3257.5 2920.5,3257.5 3050.5,3127.5 3050.5,3028.5 3029.5,3007.5 3029.5,2978.02
LNGCS5: U1.C2 | length 842
  Top Layer w5: v1@3009.68,2991.06 U1.C2@3025.63,2975.29 ; v1@3011.75,2989.45 U1.C2@3033.18,2982.83 ; v1@3014,2988.97 cw(c3014,2975.69) 3023.39,2985.08 cw(c3032.78,2994.47) v1@3019.5,2994.47 ; v1@3017.41,2998.79 U1.C2@3033.18,2982.83 ; v1@3019.02,2996.72 U1.C2@3025.63,2975.29 ; U1.C2@3024.49,2978.61 ccw(c3011.51,2978.61) 3020.69,2987.78 ccw(c3029.86,2996.95) U1.C2@3029.86,2983.98 ; v1(3014,2994.47) U1.C2@3029.86,2978.61 ; v1(3014,2994.47) U1.C2@3025.63,2975.29 ; v1(3014,2994.47) U1.C2@3033.18,2982.83 ; v1(3014,2994.47) U1.C2@3029.86,2978.61 ; U1.C2@3029.86,2978.61 3018.34,2997.85 U1.C2@3029.86,2978.61 ; U1.C2@3029.86,2978.61 3010.62,2990.13 U1.C2@3029.86,2978.61
  SIGNAL_1 w5: v1@3008.5,2994.47 ccw(c2995.22,2994.47) 3004.61,3003.86 ccw(c3014,3013.25) v1@3014,2999.97 ; v1@3009.67,2991.08 2998,3010.47 ; v1(3014,2994.47) 2998,3010.47 ; v1@3017.39,2998.8 2998,3010.47 ; v1@3035.5,3222.5 3021,3208 ; 2998,3010.47 2998,3185 3021,3208 ; 3021,3208 3038,3225 v1(3039,3225) ; 3021,3208 3042.31,3220.61 3021,3208 ; 3021,3208 3034.8,3228.55 3021,3208 ; 3021,3208 v1(3039,3225) ; 3021,3208 v1(3039,3225) ; 3027.9,3214.9 cw(c3039,3203.81) 3039,3219.5 ccw(c3039,3203.81) 3027.9,3214.9 ; 3030.32,3217.32 ccw(c3022.64,3225) 3033.5,3225 cw(c3022.64,3225) 3030.32,3217.32
LNOE: pad.PC9 U1.C5 U10.28 | length 3420.6
  Top Layer w5: U1.C5@3029.86,2889.49 ccw(c3029.86,2902.47) 3039.04,2893.29 ccw(c3048.21,2884.12) U1.C5@3035.24,2884.12 ; v1@3040,2899.76 cw(c3026.72,2899.76) 3036.11,2890.37 cw(c3045.5,2880.98) v1@3045.5,2894.26 ; v1@3040.47,2901.98 U1.C5@3034.1,2880.81 ; v1@3041.16,2903.13 U1.C5@3029.86,2884.12 ; v1@3042.1,2904.08 U1.C5@3026.55,2888.35 ; v1@3047.73,2894.73 U1.C5@3026.55,2888.35 ; v1@3048.88,2895.41 U1.C5@3029.86,2884.12 ; v1@3049.82,2896.36 U1.C5@3034.1,2880.81 ; v1@3326.54,3752.84 3332,3730.5 ; v1@3328.11,3749.61 cw(c3318.72,3740.22) 3332,3740.22 cw(c3345.28,3740.22) v1@3335.89,3749.61 ; v1@3337.46,3752.84 3332,3730.5 ; 3369.8,3680.69 U10.28@3389.72,3680.69 ; U10.28@3388.01,3678.98 ccw(c3383.88,3674.84) 3383.88,3680.69 ccw(c3383.88,3686.53) U10.28@3388.01,3682.4 ; U10.28@3408.42,3680.69 3356.31,3680.69 3332,3705 v1(3332,3753.5) 3332,3730.5 ; U1.C5@3026.55,2888.35 v1(3045.5,2899.76) ; U1.C5@3026.55,2888.35 v1(3045.5,2899.76) ; U1.C5@3029.86,2884.12 v1(3045.5,2899.76) ; U1.C5@3029.86,2884.12 v1(3045.5,2899.76) ; U1.C5@3034.1,2880.81 v1(3045.5,2899.76) ; U1.C5@3034.1,2880.81 v1(3045.5,2899.76)
  SIGNAL_2 w5: pad.PC9@2525.44,3856.54 2570.98,3872.94 ; pad.PC9@2527.41,3851.85 2570.98,3872.94 ; pad.PC9@2529.85,3847.42 2570.98,3872.94 ; pad.PC9@2532.71,3843.3 2570.98,3872.94 ; pad.PC9@2536.76,3838.71 2575.5,3877.45 2575.5,3935.5 2598.57,3958.57 2946.43,3958.57 2970.5,3934.5 2970.5,3833.39 3050.39,3753.5 v1(3332,3753.5) ; pad.PC9@2536.76,3849.83 ccw(c2536.76,3876.68) 2555.74,3857.69 ccw(c2574.73,3838.71) pad.PC9@2547.88,3838.71 ; pad.PC9@2536.76,3854.83 ccw(c2536.76,3893.75) 2564.28,3866.23 ccw(c2591.8,3838.71) pad.PC9@2552.88,3838.71 ; pad.PC9@2536.76,3859.83 ccw(c2536.76,3910.82) 2572.81,3874.77 ccw(c2608.87,3838.71) pad.PC9@2557.88,3838.71 ; pad.PC9@2541.35,3834.66 2570.98,3872.94 ; pad.PC9@2545.47,3831.8 2570.98,3872.94 ; pad.PC9@2549.9,3829.37 2570.98,3872.94 ; pad.PC9@2554.59,3827.39 2570.98,3872.94 ; v1@3328.11,3749.61 ccw(c3318.72,3740.22) 3318.72,3753.5 ccw(c3318.72,3766.78) v1@3328.11,3757.39 ; v1@3331.34,3748.04 3309,3753.5 v1@3331.34,3758.96
  Bottom Layer w5: v1(3045.5,2899.76) 3135.76,2899.76 3173.5,2937.5 3173.5,3664 3263,3753.5 v1(3332,3753.5) ; v1@3046.16,2894.3 3068.5,2899.76 v1@3046.16,2905.22 ; v1@3049.39,2895.87 cw(c3058.78,2886.48) 3058.78,2899.76 cw(c3058.78,2913.03) v1@3049.39,2903.65 ; v1@3328.11,3749.61 ccw(c3318.72,3740.22) 3318.72,3753.5 ccw(c3318.72,3766.78) v1@3328.11,3757.39 ; v1@3331.34,3748.04 3309,3753.5 v1@3331.34,3758.96
LNSCAS: R54.1 U6.17 U7.17 | length 3312.6
  Top Layer w5: R54.1@2956.19,3172.15 2968.5,3199.5 ; R54.1@2959.57,3178.34 ccw(c2938.01,3199.9) 2968.5,3199.9 ; R54.1@2960.97,3170.46 2968.5,3199.5 ; v1@2963.04,3289.84 2968.5,3267.5 ; R54.1@2963.11,3174.81 ccw(c2950.08,3187.83) 2968.5,3187.83 ; v1@2964.61,3286.61 cw(c2955.22,3277.22) 2968.5,3277.22 cw(c2981.78,3277.22) v1@2972.39,3286.61 ; 2968.5,3187.39 ccw(c2986.3,3187.39) R54.1@2973.71,3174.81 ; 2968.5,3199.46 ccw(c2998.37,3199.46) R54.1@2977.25,3178.34 ; v1@2973.96,3289.84 2968.5,3267.5 ; R54.1@2975.85,3170.42 2968.5,3199.5 ; R54.1@2980.64,3172.07 2968.5,3199.5 ; U7.17@3881.85,2202.74 3890,2226.23 ; U6.17@3881.99,2748.36 3889.06,2760.06 ; U7.17@3883.87,2206.58 ccw(c3869.08,2221.37) 3890,2221.37 ; v1@3884.54,2245.34 3890,2223 v1@3895.46,2245.34 ; U6.17@3885.01,2752.51 ccw(c3880,2760.06) 3889.06,2760.06 ; v1@3886.11,2242.11 cw(c3876.72,2232.72) 3890,2232.72 cw(c3903.28,2232.72) v1@3893.89,2242.11 ; v1@3888.54,3057.34 3894,3035 v1@3899.46,3057.34 ; U7.17@3889.06,2179.73 3890,2180.67 v1(3890,2246) ; U7.17@3889.06,2201.39 3890,2226.23 ; U6.17@3889.06,2724.73 3889.06,2760.06 ; U6.17@3889.06,2746.39 3889.06,2760.06 ; 3890,2216.85 ccw(c3904.53,2216.85) U7.17@3894.26,2206.58 ; v1@3890.11,3054.11 cw(c3880.72,3044.72) 3894,3044.72 cw(c3907.28,3044.72) v1@3897.89,3054.11 ; U6.17@3893.12,2752.51 cw(c3898.13,2760.06) 3889.06,2760.06 ; v1(3894,3058) 3894,2765 3889.06,2760.06 ; U6.17@3896.14,2748.36 3889.06,2760.06 ; U7.17@3896.36,2202.2 3890,2226.23 ; 2968.5,3199.5 R54.1@2968.41,3169.5 2968.5,3169.59 v1(2968.5,3290.5) 2968.5,3267.5
  SIGNAL_1 w5: v1@3884.7,2247.47 3894,2270.63 ; v1@3886.11,2249.89 ccw(c3867.07,2268.93) 3894,2268.93 ; v1@3888.54,3057.34 3894,3035 ; v1@3889.65,2246.35 ccw(c3879.14,2256.86) 3894,2256.86 ; v1(3890,2246) 3894,2270.63 ; v1@3890.11,3054.11 cw(c3880.72,3044.72) 3894,3044.72 cw(c3907.28,3044.72) v1@3897.89,3054.11 ; v1@3894,2250 v1@3894,3053 ; v1(3894,3058) 3894,3035 ; v1@3895.49,2245.72 3894,2270.63 ; v1@3899.46,3057.34 3894,3035
  SIGNAL_2 w5: v1(2968.5,3290.5) 3067.5,3290.5 3300.5,3057.5 v1@3893.5,3057.5 ; v1@2969.16,3285.04 2991.5,3290.5 v1@2969.16,3295.96 ; v1@2972.39,3286.61 cw(c2981.78,3277.22) 2981.78,3290.5 cw(c2981.78,3303.78) v1@2972.39,3294.39 ; 3879.51,3057.5 ccw(c3879.51,3072.49) v1@3890.11,3061.89 ; 3881.93,3057.5 cw(c3881.93,3045.93) v1@3890.11,3054.11 ; v1@3893.22,3063.45 3870.98,3057.5 ; v1@3893.46,3052.53 3870.98,3057.5 ; v1(3894,3058) 3870.98,3057.5
LNSCS0: R63.1 U6.19 U7.19 | length 3633.9
  Top Layer w5: R63.1@2891.87,3179.47 2921.72,3194.22 ; R63.1@2894.41,3169.5 2897,3169.5 2948,3220.5 v1(2948,3304) 2948,3281 ; R63.1@2894.44,3175.12 2921.72,3194.22 ; R63.1@2899.41,3169.5 2921.72,3194.22 ; R63.1@2905.51,3165.14 2921.72,3194.22 ; R63.1@2910.09,3163.02 2921.72,3194.22 ; v1@2942.54,3303.34 2948,3281 ; v1@2953.46,3303.34 2948,3281 ; U7.19@3944.8,2202.48 v1@3952.06,2225.94 ; U6.19@3944.79,2747.47 3952.06,2771.23 ; v1@3946.54,3072.33 3952.06,3050 ; v1@3946.59,2226.98 U7.19@3945.16,2203.66 ; U7.19@3946.86,2206.58 ccw(c3934.33,2219.11) 3952.06,2219.11 ccw(c3969.78,2219.11) U7.19@3957.25,2206.58 ; U6.19@3946.86,2751.58 ccw(c3934.33,2764.11) 3952.06,2764.11 ccw(c3969.78,2764.11) U6.19@3957.25,2751.58 ; v1@3946.98,2223.76 U7.19@3958.95,2203.68 ; v1@3948.11,2222.11 cw(c3938.59,2212.59) 3952.06,2212.59 ; v1@3948.11,3069.11 cw(c3938.59,3059.59) 3952.06,3059.59 ; v1(3952,3073) 3952.06,3050 ; U7.19@3952.06,2179.73 v1@3952.06,2225.94 ; U7.19@3952.06,2201.39 v1@3952.06,2225.94 ; 3952.06,2212.86 cw(c3965.14,2212.86) v1@3955.89,2222.11 ; U6.19@3952.06,2724.73 v1@3952.06,3072.94 ; U6.19@3952.06,2746.39 3952.06,2771.23 ; 3952.06,3059.86 cw(c3965.14,3059.86) v1@3955.89,3069.11 ; v1@3957.03,2223.78 U7.19@3945.16,2203.66 ; v1@3957.41,2227.01 U7.19@3958.95,2203.68 ; v1@3957.46,3072.36 3952.06,3050 ; U7.19@3959.32,2202.48 v1@3952.06,2225.94 ; U6.19@3959.32,2747.47 3952.06,2771.23 ; U7.19@3945.16,2203.66 v1(3952,2226) ; v1(3952,2226) U7.19@3952.06,2203 ; v1(3952,2226) U7.19@3958.95,2203.68 ; v1(3952,2226) U7.19@3952.06,2203 ; U7.19@3952.06,2203 3957.46,2225.36 U7.19@3952.06,2203 ; U7.19@3952.06,2203 3946.54,2225.33 U7.19@3952.06,2203
  SIGNAL_1 w5: v1@3946.54,3072.34 3952,3050 ; v1@3948.11,3069.11 cw(c3938.72,3059.72) 3952,3059.72 cw(c3965.28,3059.72) v1@3955.89,3069.11 ; v1@3948.71,2230.41 3965.5,2239.5 ; v1(3952,2226) 3965.5,2239.5 ; v1@3952,2231.5 ccw(c3952,2244.78) 3961.39,2235.39 ccw(c3970.78,2226) v1@3957.5,2226 ; v1@3956.41,2222.71 3965.5,2239.5 ; v1@3957.46,3072.34 3952,3050 ; 3952,3050 v1(3952,3073) 3952,3049.5 3965.5,3036 3965.5,2239.5
  SIGNAL_2 w5: v1(2948,3304) 2952.97,3308.97 3433.53,3308.97 3468.5,3274 3814.42,3274 3952,3136.42 v1(3952,3073) ; v1@2948.35,3303.65 cw(c2961.2,3290.8) 2961.2,3308.97 ; v1@2951.89,3300.11 cw(c2973.28,3278.72) 2973.28,3308.97 ; v1@3946.54,3073.66 3952,3096 v1@3957.46,3073.66 ; v1@3948.11,3076.89 ccw(c3938.72,3086.28) 3952,3086.28 ccw(c3965.28,3086.28) v1@3955.89,3076.89
LNSRAS: R36.1 U6.18 U7.18 | length 3304.4
  Top Layer w5: R36.1@3301.41,3167.5 3305.9,3172 v1(3339,3172) ; R36.1@3306.22,3175 v1@3336.55,3172 ; R36.1@3306.41,3167.5 v1@3336.55,3172 ; R36.1@3307.14,3179.98 v1@3336.55,3172 ; R36.1@3308.42,3160.28 v1@3336.55,3172 ; R36.1@3310.75,3155.78 v1@3336.55,3172 ; R36.1@3312.56,3163.21 cw(c3329.41,3151.45) 3329.41,3172 ; R36.1@3315.25,3176.34 ccw(c3325.73,3186.83) 3325.73,3172 ; R36.1@3316.66,3160.35 cw(c3339,3144.76) v1(3339,3172) ; v1@3335.11,3168.11 ccw(c3325.72,3158.72) 3325.72,3172 ccw(c3325.72,3185.28) v1@3335.11,3175.89 ; v1@3335.8,3176.47 R36.1@3317.75,3160.18 ; v1@3336.5,3176.9 R36.1@3316.85,3163.79 ; v1@3337.08,3166.84 R36.1@3316.38,3177.47 ; v1@3337.63,3177.33 R36.1@3316.12,3168.95 ; v1@3337.87,3166.62 R36.1@3316.05,3174.03 ; v1@3338.34,3166.54 3316,3172 v1@3338.34,3177.46 ; v1@3338.83,3177.5 R36.1@3316.05,3174.03 ; v1@3339.07,3166.5 R36.1@3316.12,3168.95 ; v1@3339.65,3177.46 R36.1@3316.38,3177.47 ; v1@3340.3,3166.66 R36.1@3316.85,3163.79 ; v1@3341.11,3166.92 R36.1@3317.75,3160.18 ; U7.18@3913.3,2202.47 3920.56,2226.23 ; U6.18@3914.51,2750.55 3931,2768 ; U7.18@3915.37,2206.58 ccw(c3902.83,2219.11) 3920.56,2219.11 ccw(c3938.29,2219.11) U7.18@3925.75,2206.58 ; v1@3917.5,2247.93 3920.56,2224.6 ; U6.18@3917.65,2753.13 ccw(c3915.73,2757.56) 3920.56,2757.56 ; U6.18@3918.11,2745.35 cw(c3928.32,2749.65) 3920.49,2757.49 ; U7.18@3920.56,2179.73 v1@3920.56,2245.56 ; U7.18@3920.56,2201.39 3920.56,2226.23 ; 3920.56,2228.83 cw(c3942.17,2228.83) v1@3926.89,2244.11 ; U6.18@3920.56,2724.73 3920.56,2757.56 ; U6.18@3922.72,2747.3 cw(c3935.71,2752.77) 3925.74,2762.74 ; v1(3923,2248) 3920.56,2224.6 ; U6.18@3923.47,2753.13 cw(c3925.39,2757.56) 3920.56,2757.56 ; v1@3923.61,3056.89 3931,3034.69 ; v1@3925.11,3054.11 cw(c3910.89,3039.89) 3931,3039.89 ; U6.18@3927.33,2749.24 cw(c3943.11,2755.89) 3931,2768 ; U6.18@3927.58,2744.24 3931,2768 ; U7.18@3927.82,2202.47 3920.56,2226.23 ; v1@3928.37,2246.79 3920.56,2224.6 ; 3931,3049.55 cw(c3937.45,3049.55) v1@3932.89,3054.11 ; v1@3934.5,3057.82 3931,3034.69 ; R36.1@3316.05,3174.03 v1(3339,3172) ; R36.1@3316.12,3168.95 v1(3339,3172) ; R36.1@3316.38,3177.47 v1(3339,3172) ; R36.1@3316.85,3163.79 v1(3339,3172) ; R36.1@3317.75,3160.18 v1(3339,3172) ; U6.18@3920.56,2746.39 3931,2768 ; U6.18@3920.56,2746.39 3920.56,2757.56 ; U6.18@3920.56,2746.39 3920.56,2757.56 ; 3920.56,2757.56 3931,2768 ; 3920.56,2757.56 3913.63,2748.8 3920.56,2757.56 ; 3920.56,2757.56 3927.49,2748.8 3920.56,2757.56 ; 3931,2768 3931,3056 v1(3929,3058) 3931,3034.69
  SIGNAL_1 w5: v1@3919.54,2252.27 3941.61,2266.61 ; v1(3923,2248) 3941.61,2266.61 ; v1@3923,2253.5 ccw(c3923,2266.78) 3932.39,2257.39 ccw(c3941.78,2248) v1@3928.5,2248 ; v1@3927.27,2244.54 3941.61,2266.61 ; 3929,2254 3955.5,2280.5 3955.5,3031.5 v1(3929,3058) ; v1@3929,3052.5 cw(c3929,3039.22) 3938.39,3048.61 cw(c3947.78,3058) v1@3934.5,3058
  SIGNAL_2 w5: v1(3339,3172) 3792.5,3172 3872,3092.5 3894.5,3092.5 v1(3929,3058) 3910.39,3076.61 ; v1@3339.66,3166.54 3362,3172 v1@3339.66,3177.46 ; v1@3342.89,3168.11 cw(c3352.28,3158.72) 3352.28,3172 cw(c3352.28,3185.28) v1@3342.89,3175.89 ; v1@3923.5,3058 ccw(c3910.22,3058) 3919.61,3067.39 ccw(c3929,3076.78) v1@3929,3063.5 ; v1@3924.73,3054.54 3910.39,3076.61 ; v1@3932.46,3062.27 3910.39,3076.61
LNWBE0: U1.D4 U6.15 | length 1794.1
  Top Layer w5: U1.D4@2998.37,2920.99 ccw(c2998.37,2933.96) 3007.54,2924.79 ccw(c3016.71,2915.61) U1.D4@3003.74,2915.61 ; v1@3008.25,2931 cw(c2994.97,2931) 3004.36,2921.61 cw(c3013.75,2912.22) v1@3013.75,2925.5 ; v1@3008.71,2933.2 U1.D4@3002.61,2912.31 ; v1@3009.4,2934.37 U1.D4@2998.37,2915.61 ; v1@3010.36,2935.33 U1.D4@2995.06,2919.85 ; v1@3015.95,2925.96 U1.D4@2995.06,2919.85 ; v1@3017.12,2926.65 U1.D4@2998.37,2915.61 ; v1@3018.08,2927.61 U1.D4@3002.61,2912.31 ; v1(3817,2973) 3817,2965.08 3826.07,2956.01 U6.15@3826.07,2724.73 ; v1@3817.4,2972.7 ccw(c3822.71,2968.74) 3818.03,2964.05 ; U6.15@3818.81,2747.47 3826.07,2771.23 ; U6.15@3820.88,2751.58 ccw(c3808.35,2764.11) 3826.07,2764.11 ccw(c3843.8,2764.11) U6.15@3831.26,2751.58 ; v1@3821.41,2969.71 ccw(c3827.39,2965.25) 3822.11,2959.97 ; U6.15@3826.07,2746.39 3826.07,2771.23 ; U6.15@3833.33,2747.47 3826.07,2771.23 ; U1.D4@2995.06,2919.85 v1(3013.75,2931) ; U1.D4@2995.06,2919.85 v1(3013.75,2931) ; U1.D4@2998.37,2915.61 v1(3013.75,2931) ; U1.D4@2998.37,2915.61 v1(3013.75,2931) ; U1.D4@3002.61,2912.31 v1(3013.75,2931) ; U1.D4@3002.61,2912.31 v1(3013.75,2931)
  SIGNAL_2 w5: v1@3010.4,2926.64 3028.75,2916 ; v1@3013.75,2925.5 cw(c3013.75,2912.22) 3023.14,2921.61 cw(c3032.53,2931) v1@3019.25,2931 ; v1(3013.75,2931) 3028.75,2916 ; v1@3018.11,2934.35 3028.75,2916 ; 3664,2958.5 3802.5,2958.5 ; v1@3811.5,2973 cw(c3798.22,2973) 3807.61,2963.61 cw(c3817,2954.22) v1@3817,2967.5 ; v1@3812.62,2976.33 3802.5,2958.5 ; v1@3820.33,2968.62 3802.5,2958.5 ; 3028.75,2916 3088.72,2916 3100.22,2927.5 3321.93,2927.5 3352.93,2958.5 3802.5,2958.5 ; 3802.5,2958.5 v1(3817,2973) 3802.5,2958.5
LNWBE1: pad.PC6 U1.B5 U6.39 | length 3892
  Top Layer w5: U1.B5@3058.03,2888.34 3077.48,2900.24 ; U1.B5@3061.36,2884.12 3077.48,2900.24 ; U1.B5@3061.36,2889.49 ccw(c3061.36,2902.47) 3070.53,2893.29 ccw(c3079.71,2884.12) U1.B5@3066.73,2884.12 ; v1(3062,3346) 3099,3346 3268,3177 ; v1@3062.66,3340.54 3085,3346 v1@3062.66,3351.46 ; U1.B5@3065.58,2880.79 3077.48,2900.24 ; v1@3065.89,3342.11 cw(c3075.28,3332.72) 3075.28,3346 cw(c3075.28,3359.28) v1@3065.89,3349.89 ; v1@3262.56,3194.16 3268,3177 ; v1@3264.11,3191.11 cw(c3254.72,3181.72) 3268,3181.72 cw(c3281.28,3181.72) v1@3271.89,3191.11 ; v1(3268,3195) 3268,3177 ; v1@3273.44,3194.16 3268,3177 ; v1@3852.19,3131.41 U6.39@3850.33,3153.02 ; U6.39@3852.38,3149.07 cw(c3839.84,3136.53) 3857.57,3136.53 cw(c3875.29,3136.53) U6.39@3862.76,3149.07 ; v1@3852.66,3135.05 U6.39@3864.8,3153.02 ; v1@3853.68,3136.46 ccw(c3844.29,3145.85) 3857.57,3145.85 ccw(c3870.85,3145.85) v1@3861.46,3136.46 ; U6.39@3857.57,3175.91 v1(3857.57,3132.57) ; v1@3862.48,3135.05 U6.39@3850.33,3153.02 ; v1@3862.94,3131.41 U6.39@3864.8,3153.02 ; v1@3863.02,3133.27 U6.39@3857.57,3154.26 ; v1@3863.03,3133.23 3857.57,3155.57 3852.11,3133.23 U6.39@3857.57,3154.26 ; 3077.48,2900.24 3138.32,2900.24 3203.5,2965.42 3203.5,3002.42 3268,3066.92 3268,3177 ; U6.39@3850.33,3153.02 v1(3857.57,3132.57) ; v1(3857.57,3132.57) U6.39@3864.8,3153.02 ; v1(3857.57,3132.57) U6.39@3857.57,3154.26
  SIGNAL_2 w5: pad.PC6@2358.15,3917.45 cw(c2307.16,3917.45) 2343.22,3881.39 cw(c2379.28,3845.33) pad.PC6@2379.28,3896.33 ; pad.PC6@2361.44,3928.77 2345.05,3883.22 ; pad.PC6@2363.15,3917.45 cw(c2324.23,3917.45) 2351.75,3889.93 cw(c2379.28,3862.4) pad.PC6@2379.28,3901.33 ; pad.PC6@2366.14,3926.79 2345.05,3883.22 ; pad.PC6@2368.15,3917.45 cw(c2341.3,3917.45) 2360.29,3898.46 cw(c2379.28,3879.48) pad.PC6@2379.28,3906.33 ; pad.PC6@2370.56,3924.36 2345.05,3883.22 ; pad.PC6@2374.68,3921.49 2345.05,3883.22 ; pad.PC6@2379.28,3917.45 2336,3874.17 2336,3472.5 2462.5,3346 v1(3062,3346) ; pad.PC6@2383.32,3912.85 2345.05,3883.22 ; pad.PC6@2386.18,3908.73 2345.05,3883.22 ; pad.PC6@2388.62,3904.31 2345.05,3883.22 ; pad.PC6@2390.59,3899.61 2345.05,3883.22 ; v1@3058.11,3342.11 ccw(c3048.72,3332.72) 3048.72,3346 ccw(c3048.72,3359.28) v1@3058.11,3349.89 ; v1@3061.34,3340.54 3039,3346 v1@3061.34,3351.46 ; v1(3268,3195) 3795.14,3195 v1(3857.57,3132.57) 3838.96,3151.17 ; v1@3268.66,3189.54 3291,3195 v1@3268.66,3200.46 ; v1@3271.89,3191.11 cw(c3281.28,3181.72) 3281.28,3195 cw(c3281.28,3208.28) v1@3271.89,3198.89 ; v1@3852.07,3132.57 ccw(c3838.79,3132.57) 3848.18,3141.96 ccw(c3857.57,3151.35) v1@3857.57,3138.07 ; v1@3853.29,3129.11 3838.96,3151.17 ; v1@3861.03,3136.84 3838.96,3151.17
LNWBE2: U1.D5 U7.15 | length 2760.4
  Top Layer w5: U1.D5@2998.37,2889.49 ccw(c2998.37,2902.47) 3007.54,2893.29 ccw(c3016.71,2884.12) U1.D5@3003.74,2884.12 ; v1@3008.24,2899.49 cw(c2994.96,2899.49) 3004.35,2890.1 cw(c3013.74,2880.71) v1@3013.74,2893.99 ; v1@3008.7,2901.69 U1.D5@3002.61,2880.82 ; v1@3009.39,2902.86 U1.D5@2998.37,2884.12 ; v1@3010.35,2903.82 U1.D5@2995.06,2888.36 ; v1@3015.94,2894.45 U1.D5@2995.06,2888.36 ; v1@3017.11,2895.14 U1.D5@2998.37,2884.12 ; v1@3018.07,2896.1 U1.D5@3002.61,2880.82 ; U7.15@3818.81,2202.45 v1@3826,2226.23 ; v1@3820.55,2229.77 U7.15@3820.02,2206.45 ; U7.15@3820.88,2206.58 ccw(c3808.52,2218.94) 3826,2218.94 ; v1@3820.9,2226.95 U7.15@3832.1,2206.47 ; v1@3822.11,2225.11 cw(c3812.72,2215.72) 3826,2215.72 cw(c3839.28,2215.72) v1@3829.89,2225.11 ; 3826,2219.29 ccw(c3843.97,2219.29) U7.15@3831.26,2206.58 ; U7.15@3826.07,2179.73 3826,2179.8 v1(3826,2229) ; U7.15@3826.07,2201.39 v1@3826,2226.23 ; v1@3831.11,2226.97 U7.15@3820.02,2206.45 ; v1@3831.44,2229.8 U7.15@3832.1,2206.47 ; U7.15@3833.33,2202.49 v1@3826,2226.23 ; U1.D5@2995.06,2888.36 v1(3013.74,2899.49) ; U1.D5@2995.06,2888.36 v1(3013.74,2899.49) ; U1.D5@2998.37,2884.12 v1(3013.74,2899.49) ; U1.D5@2998.37,2884.12 v1(3013.74,2899.49) ; U1.D5@3002.61,2880.82 v1(3013.74,2899.49) ; U1.D5@3002.61,2880.82 v1(3013.74,2899.49) ; U7.15@3820.02,2206.45 v1(3826,2229) ; v1(3826,2229) U7.15@3832.1,2206.47 ; v1(3826,2229) U7.15@3826.06,2206 ; U7.15@3826.06,2206 3831.46,2228.36 3826,2206 3820.54,2228.34 U7.15@3826.06,2206
  SIGNAL_1 w5: v1@3010.35,2903.82 3029.86,2915.61 ; v1(3013.74,2899.49) 3029.86,2915.61 ; v1@3013.74,2904.99 ccw(c3013.74,2918.27) 3023.13,2908.88 ccw(c3032.52,2899.49) v1@3019.24,2899.49 ; v1@3018.07,2896.1 3029.86,2915.61 ; 3340.31,2976 ccw(c3340.31,2992.69) v1@3352.11,2980.89 ; 3345.14,2976 cw(c3345.14,2966.14) v1@3352.11,2973.11 ; v1@3355,2976 3256.92,2976 3196.53,2915.61 3029.86,2915.61 ; v1@3355.11,2982.43 3332.94,2976 ; v1@3355.58,2971.52 3332.94,2976 ; v1(3356,2977) 3332.94,2976 ; v1@3785.54,2969.73 3807.61,2955.39 v1@3793.27,2977.46 ; v1@3789,2968.5 cw(c3789,2955.22) 3798.39,2964.61 cw(c3807.78,2974) v1@3794.5,2974 ; v1(3789,2974) 3826,2937 v1(3826,2229) ; v1@3820.54,2229.66 3826,2252 v1@3831.46,2229.66 ; v1@3822.11,2232.89 ccw(c3812.72,2242.28) 3826,2242.28 ccw(c3839.28,2242.28) v1@3829.89,2232.89
  SIGNAL_2 w5: v1(3356,2977) 3786,2977 v1(3789,2974) 3765.2,2977 ; v1@3356.66,2971.54 3379,2977 v1@3356.66,2982.46 ; v1@3359.89,2973.11 cw(c3369.28,2963.72) 3369.28,2977 cw(c3369.28,2990.28) v1@3359.89,2980.89 ; 3768.48,2977 cw(c3768.48,2953.48) v1@3785.11,2970.11 ; 3780.55,2977 cw(c3780.55,2965.55) v1@3788.65,2973.65 ; v1@3787.69,2968.66 3765.2,2977 ; v1@3789.06,2979.5 3765.2,2977
LNWBE3: U1.E5 U7.39 | length 2211.5
  Top Layer w5: U1.E5@2966.87,2889.49 ccw(c2966.87,2902.47) 2976.04,2893.29 ccw(c2985.22,2884.12) U1.E5@2972.24,2884.12 ; U1.E5@2972.08,2889.33 ccw(c2961.41,2900) v1@2976.5,2900 ; 2973.89,2891.14 cw(c2982,2883.04) v1@2982,2894.5 ; v1@2976.92,2902.1 U1.E5@2971.12,2880.83 ; v1@2977.57,2903.26 U1.E5@2966.87,2884.12 ; v1@2978.5,2904.24 U1.E5@2963.58,2888.37 ; v1@2984.33,2895.02 U1.E5@2963.58,2888.37 ; v1@2985.48,2895.74 U1.E5@2966.87,2884.12 ; v1@2986.41,2896.71 U1.E5@2971.12,2880.83 ; v1@3838.63,2576.2 3857.57,2587.43 ; v1(3842,2571.86) 3857.57,2587.43 ; v1@3842,2577.36 ccw(c3842,2590.64) 3851.39,2581.25 ccw(c3860.78,2571.86) v1@3847.5,2571.86 ; v1@3844.57,2574.43 3857.57,2587.43 ; v1@3846.34,2568.49 3857.57,2587.43 ; U7.39@3850.33,2608.03 3857.57,2587.43 ; U7.39@3852.38,2604.07 cw(c3839.84,2591.53) 3857.57,2591.53 cw(c3875.29,2591.53) U7.39@3862.76,2604.07 ; U7.39@3857.57,2609.26 3857.57,2587.43 ; U7.39@3857.57,2630.91 3857.57,2587.43 ; U7.39@3864.81,2608.03 3857.57,2587.43 ; U1.E5@2963.58,2888.37 v1@2982,2899.25 ; U1.E5@2963.58,2888.37 v1(2982,2900) ; U1.E5@2966.87,2884.12 v1@2982,2899.25 ; U1.E5@2966.87,2884.12 v1(2982,2900) ; U1.E5@2971.12,2880.83 v1@2982,2899.25 ; U1.E5@2971.12,2880.83 v1(2982,2900) ; v1@2982,2899.25 v1(2982,2900)
  SIGNAL_1 w5: v1@3833.54,2964.34 3839,2942 ; v1@3835.11,2961.11 cw(c3825.72,2951.72) 3839,2951.72 cw(c3852.28,2951.72) v1@3842.89,2961.11 ; v1@3836.5,2571.8 3839,2595.66 ; 3839,2580.31 ccw(c3850.45,2580.31) v1@3842.35,2572.21 ; 3839,2592.38 ccw(c3862.52,2592.38) v1@3845.89,2575.75 ; v1@3842,2574.5 v1(3842,2571.86) ; v1@3844.46,2964.34 3839,2942 ; v1@3847.34,2573.17 3839,2595.66 ; 3839,2595.66 v1(3842,2571.86) ; 3839,2942 v1(3839,2965) 3839,2574.86 v1(3842,2571.86)
  SIGNAL_2 w5: v1@2978.76,2895.56 2999.26,2883.99 ; v1@2982,2894.5 cw(c2982,2878.21) 2993.52,2889.73 ; v1@2986.19,2903.57 2999.26,2883.99 ; v1@2987.5,2900 ccw(c2997.77,2900) 2990.51,2892.74 ; v1@3833.5,2965 cw(c3820.22,2965) 3829.61,2955.61 cw(c3839,2946.22) v1@3839,2959.5 ; v1@3834.68,2968.4 3822.5,2948.5 ; v1@3842.4,2960.68 3822.5,2948.5 ; 2999.26,2883.99 2983.25,2900 v1(2982,2900) 2999.26,2883.99 ; 2999.26,2883.99 3070.99,2883.99 3104.5,2917.5 3326.07,2917.5 3357.07,2948.5 3822.5,2948.5 ; 3822.5,2948.5 v1(3839,2965) 3822.5,2948.5